# Altium PCB NG_0036526167_Diplomski-rad_PCB.PcbDoc (part 2 of 2)
Units mm, origin at the board's own origin, x right, y up, seen from the top; angles counter-clockwise.
Board outline 100 x 90 mm, 4 copper layers (Top Layer, GND1, GND2, Bottom Layer), stack 1.586 mm thick; 152 components, 97 nets, 539 pads, 128 vias.
Unrouted connection lines stored in the file: 99.
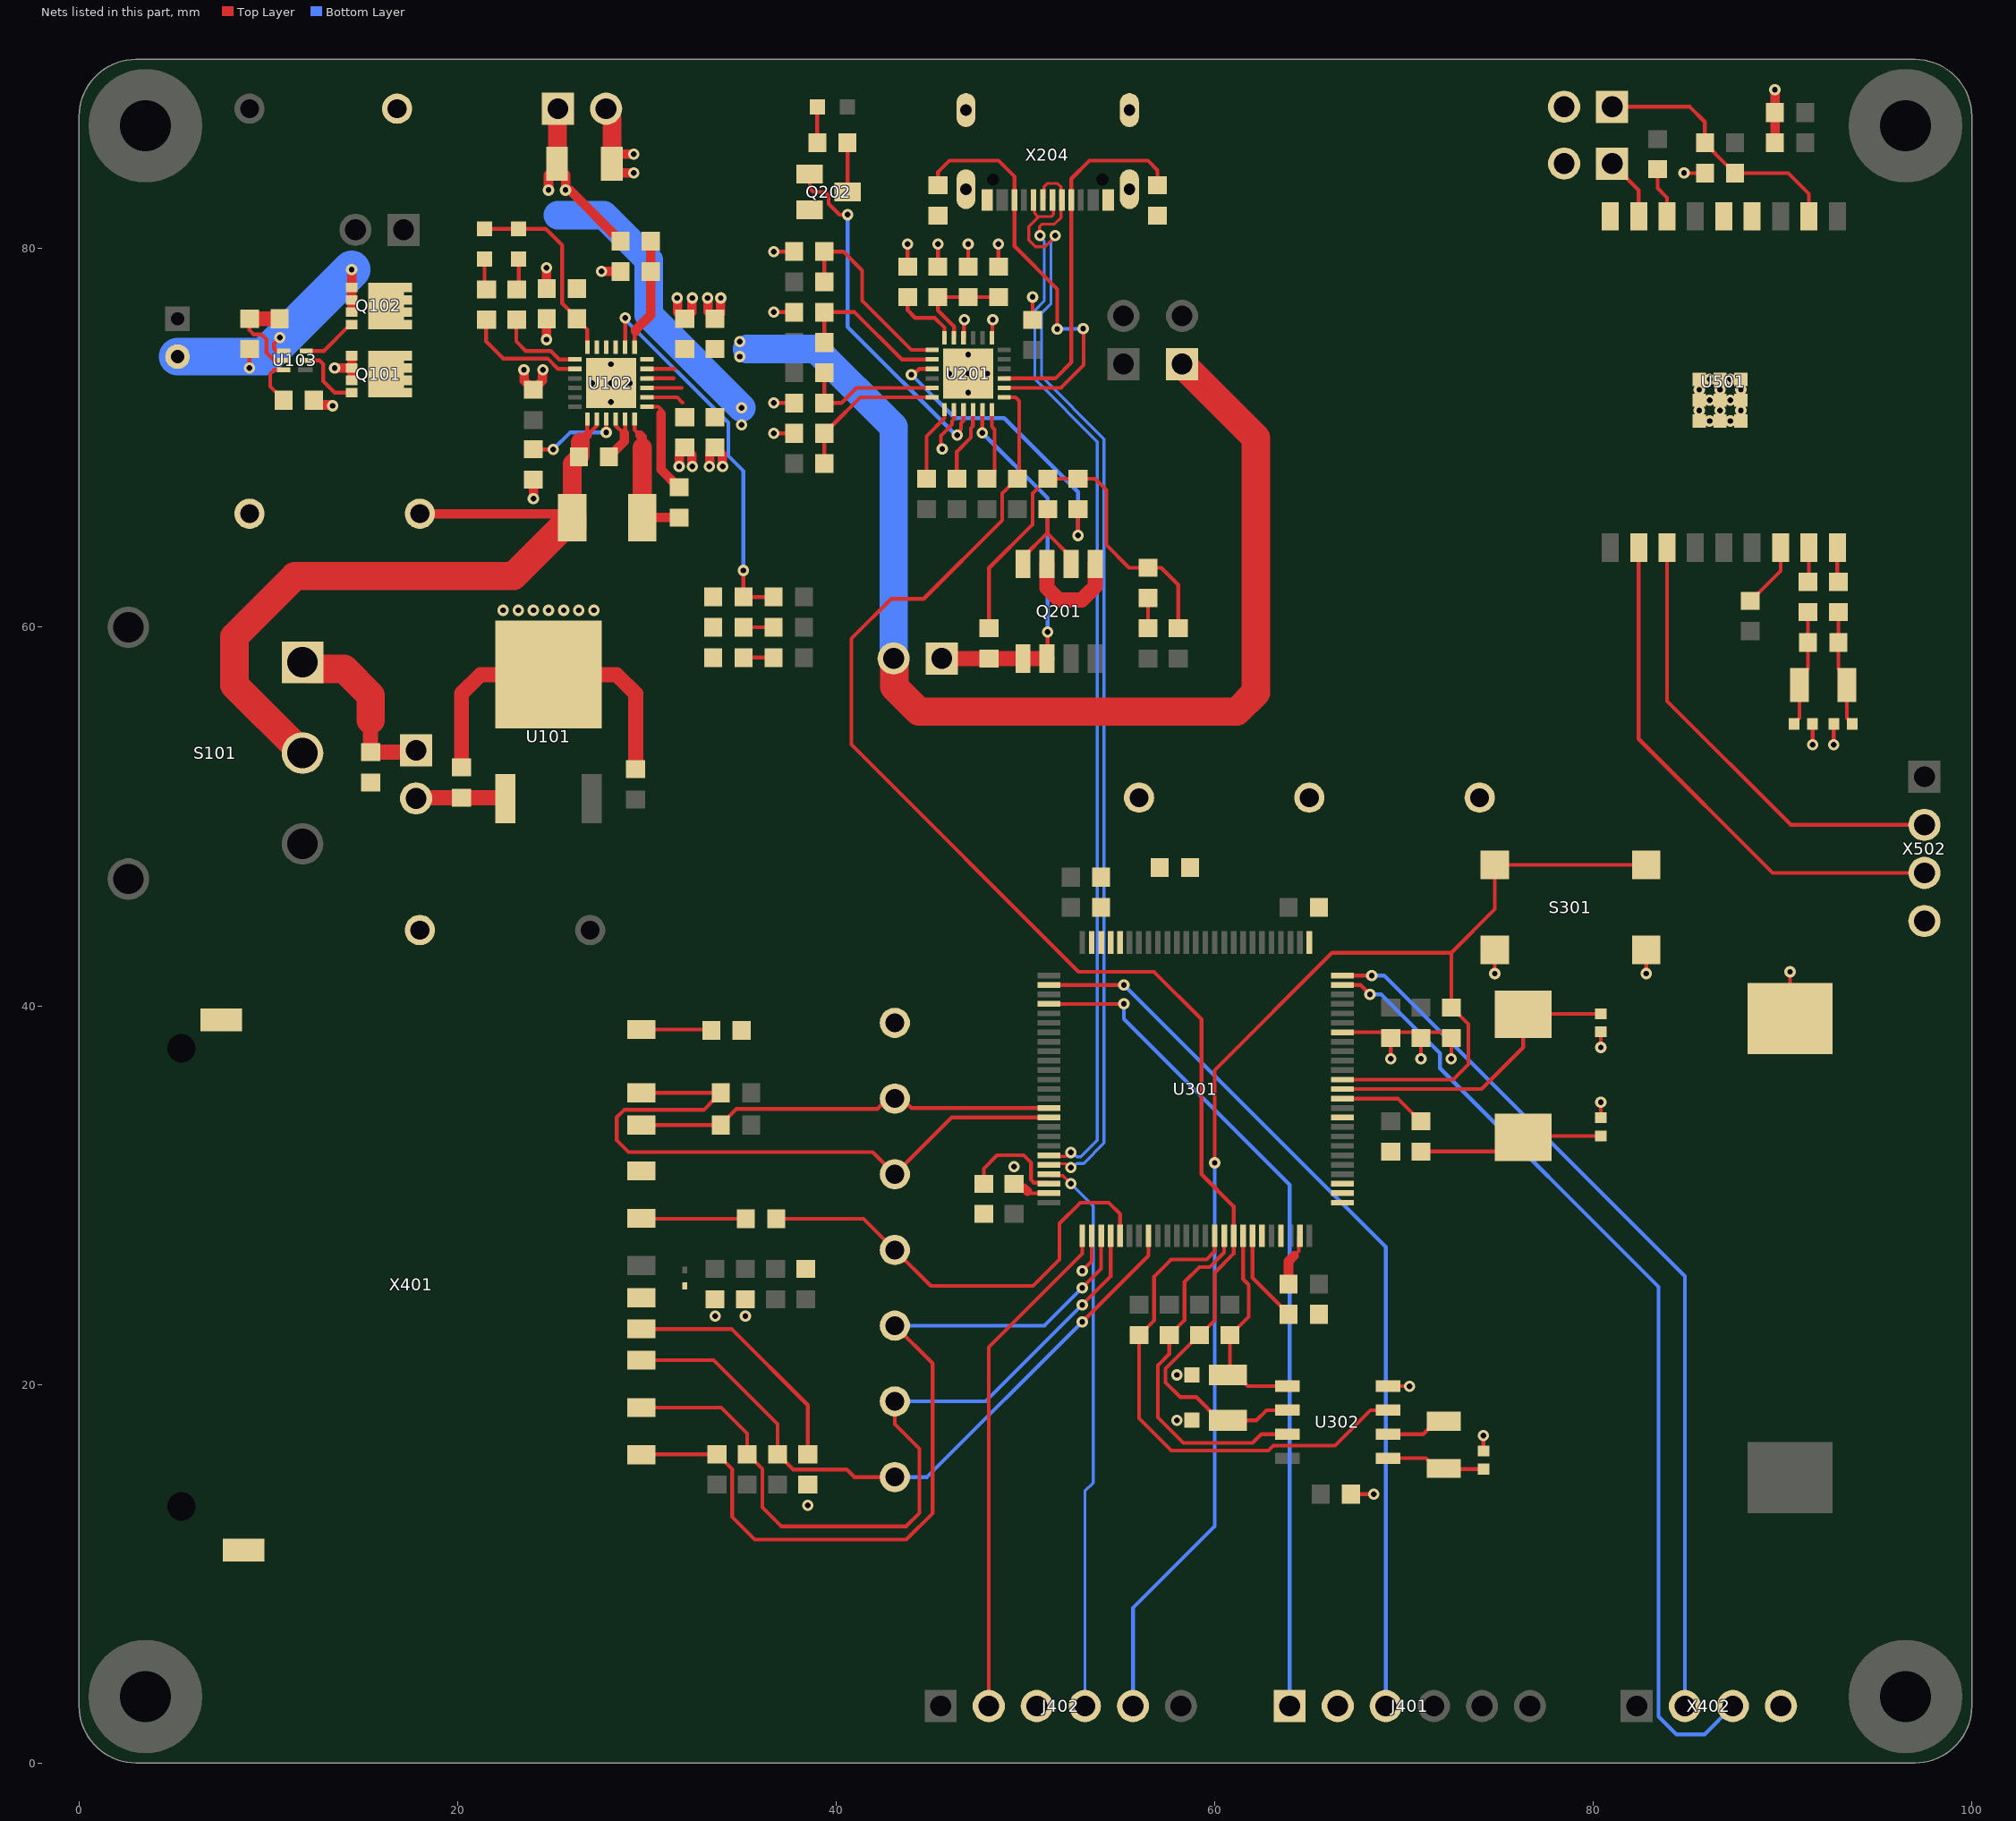
[diagram p4: the nets of this part, all layers, seen from the top]

## Via types
v1: diameter 0.6, hole 0.3, Top Layer to Bottom Layer, tented both sides, 106 vias
v2: diameter 0.6, hole 0.3, Top Layer to Bottom Layer, 22 vias

## Nets (pads, with @x,y where several pads share a name; then routed paths per layer and width w, separated by ;. In a path a pad name is that pad's centre, name@x,y a point inside that pad or via, vN(x,y) a via of type N, cw(c..) or ccw(c..) an arc to the next point about the centre after c; other vN are vias at no path point) (continued)
+VIN: C105.2 C113.1 R101.2 U102.21 X104.1 | length 26
  Top Layer w0.2: U102.21@30,72.65 31.85,72.65
  Top Layer w0.5: v1(24.8,83.1) C113.1@24.8,83.9 ; C113.1@25.7,83.9 v1(25.7,83.1) 25.719,83.081 25.944,83.081 28.6,80.425 R101.2@28.6,80.4
  Top Layer w1: C113.1@25.25,84.5 25.275,84.525 25.275,87.375 X104.1@25.3,87.4
  Bottom Layer w1.5: 25.3,81.775 27.725,81.775 30.1,79.4 30.1,76.5 v1(35,71.6)
  other v1: 35,70.7
+VSYS: C101.2 U101.1 X101.2 | length 4.8
  Top Layer w0.8: X101.2@17.8,50.96 17.84,51 C101.2@20.2,51 22.464,51 U101.1@22.514,50.95
+VSYS_J: C104.2 S101.1 X101.1 | length 9.8
  Top Layer w0.8: 15.4,55.1 C104.2@15.4,53.4 17.7,53.4 X101.1@17.8,53.5
  Top Layer w1.5: S101.1@11.8,58.15 12.15,57.8 14,57.8 15.4,56.4 15.4,55.1
+VUSB: C108.2 U102.22 X201.2 X202.1 | length 63.6
  Top Layer w0.2: U102.22@30,73.15 31.425,73.15
  Top Layer w1.5: X201.2@43.036,58.351 43.075,58.313 43.075,56.85 44.375,55.55 61.175,55.55 62.175,56.55 62.175,70.01 X202.1@58.275,73.91
  Bottom Layer w1.5: 35.3,74.7 38.925,74.7 43.036,70.589 X201.2@43.036,58.351
  other v1: 34.9,74.3 34.9,75.1
+VUSB_J: C202.2 Q201.5 Q201.6 U201.11 X201.1 | length 20.2
  Top Layer w0.2: v1(47.722,70.273) 47.723,70.274 47.723,71.498 U201.11@47.725,71.5 ; Q201.6@51.14,58.352 51.175,58.387 v1(51.175,59.75)
  Top Layer w0.8: X201.1@45.575,58.35 X201.1@45.576,58.351 Q201.6@51.14,58.352
  Bottom Layer w0.2: v1(47.722,70.273) 51.175,66.82 v1(51.175,59.75)
BP_BAT: C112.2 R104.1 U103.5 | length 5.1
  Top Layer w0.2: C112.2@9,76.3 9,75.7 9.225,75.475 9.625,75.475 9.9,75.2 9.9,74.5 10.3,74.1 U103.5@10.8,74.1
  Top Layer w0.8: C112.2@9,76.3 R104.1@10.6,76.3
BP_COUT: Q101.3 U103.2 | length 3.6
  Top Layer w0.2: U103.2@12,74.1 12.7,74.1 12.9,73.9 12.9,73 13.5,72.4 Q101.3@14.4,72.4
BP_DOUT: Q102.3 U103.3 | length 3
  Top Layer w0.2: U103.3@12,74.6 12.935,74.6 14.335,76 Q102.3@14.4,76
BP_V-: R105.2 U103.6 | length 2.5
  Top Layer w0.2: R105.2@10.8,72 10.8,72.025 10.1,72.725 10.1,73.4 10.3,73.6 U103.6@10.8,73.6
BP_VSS: C112.1 Q102.1 U103.4 X103.2 | length 15.4
  Top Layer w0.2: v1(9,73.7) C112.1@9,74.7 ; v1(10.6,75.3) 10.3,75 10.3,74.717 10.417,74.6 U103.4@10.8,74.6
  Top Layer w0.5: 14.4,76.9 Q102.1@14.4,77.3 Q102.1@14.4,77.95 v1(14.4,78.9)
  Bottom Layer w2: X103.2@5.2,74.3 9.8,74.3 v1(14.4,78.9)
CARD_DETECT: R408.2 U301.77 X401.10 | length 15.1
  Top Layer w0.2: X401.10@29.7,22.925 34.475,22.925 38.5,18.9 R408.2@38.5,16.3 ; v1(53,26) 53.5,26.5 U301.77@53.5,27.85
CHG_BOOT: C103.1 U102.19 | length 5.3
  Top Layer w0.2: U102.19@30,71.65 30.6,71.65 30.75,71.5 30.75,71.275
  Top Layer w0.5: 30.75,71.275 30.75,68.325 31.675,67.4 C103.1@31.7,67.4
CHG_C\H\G\: R106.1 U102.8 | length 6.5
  Top Layer w0.2: R106.1@21.525,76.25 21.5,76.225 21.5,75.1 22.4,74.2 24.749,74.2 25.299,73.65 U102.8@26.2,73.65
CHG_DRV: C110.2 D101.2 D102.2 U102.6 | length 10.4
  Top Layer w0.2: D101.2@21.425,81.05 D102.2@23.225,81.05 24.65,81.05 25.525,80.175 25.525,77.1 26.3,76.325 C110.2@26.3,76.3 26.3,76.275 26.85,75.725 U102.6@26.85,74.8
CHG_ILIM: R103.1 U102.15 | length 4.9
  Top Layer w0.2: R103.1@24,69.4 v1(25.05,69.4) ; v1(27.85,70.3) U102.15@27.85,71
  Bottom Layer w0.2: v1(25.05,69.4) 25.95,70.3 v1(27.85,70.3)
CHG_ISET: R108.2 U102.5
CHG_P\G\: R107.1 U102.7 | length 4.7
  Top Layer w0.2: R107.1@23.125,76.25 23.1,76.225 23.1,75.1 23.6,74.6 24.914,74.6 25.364,74.15 U102.7@26.2,74.15
CHG_PMIDI: C106.2 U102.20 | length 2.2
  Top Layer w0.2: U102.20@30,72.15 31.6,72.15 31.875,71.875
  Top Layer w0.5: C106.2@31.875,71.225 C106.2@32,71.1
CHG_PMIDU: C109.2 U102.23 | length 1.5
  Top Layer w0.2: U102.23@30,73.65 31.45,73.65
CHG_SW: C103.2 L101.1 U102.18 | length 7.3
  Top Layer w0.2: U102.18@29.35,71 29.35,70.425 29.625,70.15
  Top Layer w0.5: 29.625,70.15 29.75,70.025 29.75,69.5 ; L101.1@29.75,65.8 C103.2@31.7,65.8
  Top Layer w1: L101.1@29.75,65.8 29.75,69.5
CHG_USB1: R109.2 R112.1 U102.4 U301.3 | length 1.6
  Top Layer w0.2: R112.1@35.1,58.4 R109.2@36.7,58.4
CHG_USB2: R110.2 R113.1 U102.3 U301.2 | length 1.6
  Top Layer w0.2: R113.1@35.1,60 R110.2@36.7,60
CHG_USB3: R111.2 R114.1 U102.2 U301.1 | length 20.5
  Top Layer w0.2: U102.2@28.85,74.8 v1(28.85,76.35) ; v1(35.1,63) R114.1@35.1,61.6 R111.2@36.7,61.6
  Bottom Layer w0.2: v1(28.85,76.35) 28.85,76.265 34.3,70.815 34.3,69.049 35.1,68.249 v1(35.1,63)
CHG_VDPM: R101.1 R102.1 U102.1 | length 6
  Top Layer w0.2: U102.1@29.35,74.8 29.35,75.6 29.4,75.65
  Top Layer w0.5: 29.4,75.65 29.4,75.7 30.2,76.5 R102.1@30.2,78.8 R101.1@30.2,80.4
D101_R: D101.1 R106.2 | length 1.6
  Top Layer w0.2: D101.1@21.425,79.45 21.425,77.95 R106.2@21.525,77.85
D102_R: D102.1 R107.2 | length 1.6
  Top Layer w0.2: R107.2@23.125,77.85 23.225,77.95 D102.1@23.225,79.45
DBG_USART_RX: U301.25 X402.2 | length 47.9
  Top Layer w0.2: U301.25@66.75,41.6 v1(68.3,41.6)
  Bottom Layer w0.2: v1(68.3,41.6) 68.949,41.6 84.84,25.709 X402.2@84.84,2.5
DBG_USART_TX: U301.24 X402.3 | length 51.4
  Top Layer w0.2: U301.24@66.75,41.1 67.7,41.1 v1(68.2,40.6)
  Bottom Layer w0.2: v1(68.2,40.6) 68.8,40.6 71.9,37.5 71.9,36.7 83.45,25.15 83.45,2.45 84.4,1.5 85.88,1.5 X402.3@87.38,3
ESP_EN: C505.2 R503.1 U501.2 X501.1 | length 14.2
  Top Layer w0.2: X501.1@81,87.5 85.1,87.5 85.9,86.7 R503.1@85.9,85.6 85.9,85.575 87.075,84.4 87.125,84.4 87.5,84.025 C505.2@87.5,84 90.3,84 91.4,82.9 U501.2@91.4,81.71
ESP_IO2: R502.1 U501.16 | length 3.5
  Top Layer w0.2: R502.1@88.3,61.4 88.325,61.4 89.9,62.975 U501.16@89.9,64.21
ESP_IO8: R506.1 U501.7 | length 2.7
  Top Layer w0.2: R506.1@83.4,84.2 83.4,83.2 83.9,82.7 U501.7@83.9,81.71
ESP_IO9: U501.8 X503.1 | length 3.4
  Top Layer w0.2: X503.1@81,84.5 82.4,83.1 U501.8@82.4,81.71
ESP_RXD0: U501.11 X502.3 | length 28.1
  Top Layer w0.2: U501.11@82.4,64.21 82.4,54.1 89.48,47.02 X502.3@97.5,47.02
ESP_TXD0: U501.12 X502.2 | length 24.4
  Top Layer w0.2: U501.12@83.9,64.21 83.9,56.1 90.44,49.56 X502.2@97.5,49.56
ESP_XTAL_32K_N: R505.2 U501.17 | length 1.8
  Top Layer w0.2: R505.2@91.35,62.4 91.4,62.45 U501.17@91.4,64.21
ESP_XTAL_32K_P: R501.2 U501.18 | length 1.8
  Top Layer w0.2: U501.18@92.9,64.21 92.9,62.45 R501.2@92.95,62.4
ESP_XTAL_32K_P_N: C504.2 R504.2 R505.1 Y501.1 | length 6.2
  Top Layer w0.2: C504.2@90.62,54.9 90.62,54.925 90.9,55.205 Y501.1@90.9,56.95 90.9,57.35 91.35,57.8 R504.2@91.35,59.2 R505.1@91.35,60.8
ESP_XTAL_32K_P_R: C503.2 R501.1 R504.1 Y501.2 | length 6.2
  Top Layer w0.2: R501.1@92.95,60.8 R504.1@92.95,59.2 92.95,57.8 93.4,57.35 Y501.2@93.4,56.95 93.4,55.205 93.68,54.925 C503.2@93.68,54.9
GND: C101.1 C102.1 C104.1 C105.1 C106.1 C107.1 C108.1 C109.1 C110.1 C111.1 C113.2 C203.1 C204.1 C205.1 C206.1 C207.1 C301.1 C302.1 C303.1 C304.1 C305.1 C306.1 C307.1 C308.1 C309.1 C310.1 C311.1 C312.1 C313.1 C314.1 C315.1 C401.1 C402.1 C403.1 C501.2 C502.2 C503.1 C504.1 C505.1 D301.2 D302.2 D401.1 J401.2 J402.3 Q101.1 Q202.2 R102.2 R103.2 R105.1 R108.1 R112.2 R113.2 R114.2 R203.1 R204.1 R216.1 R217.1 R218.1 R219.1 R306.1 R407.1 R408.1 S301.3 S301.4 TP102.1 TP105.1 TP106.1 TP308.1 TP503.1 U101.2 U102.16 U102.17 U102.24 U102.25 U201.19 U201.22 U201.25 U301.10 U301.19 U301.26 U301.49 U301.74 U301.99 U302.4 U501.9 U501.19 X104.2 X204.1 X204.A1-B12 X204.B1-A12 X301.2 X401.3 X401.6 X401.12 X401.13 X402.4 X502.4 X503.2 | length 87.1
  Top Layer w0.2: U102.16@28.35,71 28.35,70.65 28.7,70.3 28.85,70.3 U102.17@28.85,71 ; v1(36.7,70.25) R217.1@37.775,70.25 ; v1(36.7,71.85) R216.1@37.775,71.85 ; v1(36.7,76.65) R219.1@37.775,76.65 ; v1(36.7,79.85) R218.1@37.775,79.85 ; C203.1@43.775,79.05 v1(43.775,80.25) ; C206.1@45.375,79.05 v1(45.375,80.25) ; U201.22@46.725,75.3 46.745,75.32 46.745,76.22 v1(46.775,76.25) ; C205.1@46.975,79.05 v1(46.975,80.25) ; U201.19@48.225,75.3 48.245,75.32 48.245,76.22 v1(48.275,76.25) ; C204.1@48.575,79.05 v1(48.575,80.25) ; 50.1,30.2 50.2,30.1 U301.74@51.25,30.1 ; C207.1@50.375,76.25 v1(50.375,77.45) ; 64.2,26.8 64.45,27.05 64.45,27.8 U301.99@64.5,27.85 ; U301.19@66.75,38.6 72.2,38.6 C315.1@72.5,38.3 v1(72.5,37.2) ; C312.1@67.2,14.2 v1(68.4,14.2) ; U302.4@69.15,19.905 69.155,19.9 v1(70.3,19.9) ; v1(69.3,37.2) C309.1@69.3,38.3 ; v1(70.9,37.2) C310.1@70.9,38.3 ; C313.1@74.2,16.48 v1(74.2,17.3) ; v1(74.8,41.7) S301.3@74.8,42.95 ; C311.1@80.4,34.08 v1(80.4,34.9) ; v1(80.4,37.8) C314.1@80.4,38.62 ; v1(82.8,41.7) S301.4@82.8,42.95 ; v1(84.8,84) C505.1@85.9,84 ; X301.2@90.4,39.325 v1(90.4,41.8) ; C504.1@91.58,54.9 91.59,54.89 91.59,53.81 v1(91.6,53.8) ; v1(92.7,53.8) 92.71,53.81 92.71,54.89 C503.1@92.72,54.9
  Top Layer w0.5: R105.1@12.4,72 12.4,71.975 12.625,71.75 13.323,71.75 13.373,71.7 v1(13.4,71.7) ; v1(13.5,73.7) Q101.1@14.4,73.7 ; 14.4,73.3 Q101.1@14.4,73.7 ; Q101.1@14.4,74.35 Q101.1@14.4,73.7 ; v1(23.5,73.6) 23.519,73.581 23.519,73.031 C111.1@23.75,72.8 ; v1(24,66.8) R103.2@24,67.8 ; C111.1@24,72.55 24.025,72.55 24.25,72.775 24.25,72.8 24.481,73.031 24.481,73.581 v1(24.5,73.6) ; v1(24.7,75.2) C110.1@24.7,76.3 ; R108.1@24.7,77.9 v1(24.7,79) ; v1(27.6,78.8) R102.2@28.6,78.8 ; C107.1@28,69 28,69.025 28.8,69.825 28.8,70.25 ; v1(29.3,84) 28.475,84 28.15,84.325 C113.2@28.15,84.5 28.15,84.675 28.475,85 v1(29.3,85) ; v1(31.6,77.4) 31.619,77.381 31.619,76.656 31.975,76.3 C109.1@32,76.3 32.025,76.3 32.381,76.656 32.381,77.381 v1(32.4,77.4) ; v1(31.7,68.5) 31.719,68.519 31.719,69.219 C106.1@31.75,69.25 ; C106.1@32,69.5 32.025,69.5 32.25,69.275 32.25,69.25 32.381,69.119 32.381,68.519 v1(32.4,68.5) ; v1(33.2,77.4) 33.219,77.381 33.219,76.681 C108.1@33.35,76.55 ; v1(33.3,68.5) 33.319,68.519 33.319,69.219 C105.1@33.35,69.25 ; C105.1@33.6,69.5 33.625,69.5 33.85,69.275 33.85,69.25 33.981,69.119 33.981,68.519 v1(34,68.5) ; C108.1@33.6,76.3 33.625,76.3 33.85,76.525 33.85,76.55 33.881,76.581 33.881,77.381 v1(33.9,77.4) ; C304.1@49.4,30.6 49.625,30.375 49.925,30.375 50.1,30.2 ; C308.1@63.9,25.3 63.9,26.5 64.2,26.8 ; C502.2@89.6,85.6 C501.2@89.6,87.2 v1(89.6,88.4)
  Top Layer w0.8: C101.1@20.2,52.6 20.2,56.5 21.2,57.5 U101.2@24.8,57.5 28.4,57.5 29.4,56.5 C102.1@29.4,52.6
  Top Layer w1: X104.2@27.84,87.4 27.84,87.211 28.15,86.901 C113.2@28.15,84.675
  other v1: 38.5,13.6 58,18.1 58,20.5 33.6,23.6 35.2,23.6 49.4,31.5 22.4,60.9 23.2,60.9 24,60.9 24.8,60.9 25.6,60.9 26.4,60.9 27.2,60.9
  other v2: 86.15,70.9 87.25,70.9 85.6,71.45 86.7,71.45 87.8,71.45 28.1,71.9 86.15,72 87.25,72 46.975,72.4 85.6,72.55 86.7,72.55 87.8,72.55 27.1,72.9 28.1,72.9 29.1,72.9 86.15,73.1 87.25,73.1 45.975,73.4 46.975,73.4 47.975,73.4 28.1,73.9 46.975,74.4
HSE_IN: R305.2 U301.12 | length 4.6
  Top Layer w0.2: U301.12@66.75,35.1 69.675,35.1 70.875,33.9 R305.2@70.9,33.9
HSE_IN_R: C311.2 R305.1 Y302.2 | length 9.8
  Top Layer w0.2: R305.1@70.9,32.3 75.55,32.3 Y302.2@76.3,33.05 76.37,33.12 C311.2@80.4,33.12
HSE_OUT: C314.2 U301.13 Y302.1 | length 16.3
  Top Layer w0.2: U301.13@66.75,35.6 74.1,35.6 76.3,37.8 Y302.1@76.3,39.55 76.33,39.58 C314.2@80.4,39.58
I2C1_SCL: D302.1 R208.1 R304.1 U201.13 U301.92 U302.6 | length 77.2
  Top Layer w0.2: U201.13@48.875,72.15 49.475,72.15 49.675,71.95 49.675,67.95 R208.1@49.575,67.85 49.55,67.85 48.775,67.075 48.775,65.65 44.625,61.5 42.9,61.5 40.8,59.4 40.8,53.8 52.8,41.8 56.793,41.8 59.3,39.293 59.3,31.1 61,29.4 U301.92@61,27.85 61,26.9 60,25.9 60,24.799 60,23.375 59.225,22.6 R304.1@59.2,22.6 59.175,22.6 57.4,20.825 57.4,20.1 58.175,19.325 59.025,19.325 60.25,18.1 D302.1@60.7,18.1 62.2,18.1 62.735,18.635 U302.6@63.85,18.635
I2C1_SDA: D301.1 R207.1 R303.1 U201.12 U301.93 U302.5 | length 15.2
  Top Layer w0.2: R207.1@47.975,67.85 48,67.85 48.375,68.225 48.375,68.25 48.375,70.45 48.225,70.6 U201.12@48.225,71.5 ; U301.93@61.5,27.85 61.5,25.559 61.8,25.259 61.8,23.575 60.825,22.6 R303.1@60.8,22.6 60.8,20.6 D301.1@60.7,20.5 61.15,20.5 61.745,19.905 U302.5@63.85,19.905
I2S2_CK: J401.3 U301.52 | length 48.3
  Top Layer w0.2: U301.52@51.25,41.1 v1(55.2,41.1)
  Bottom Layer w0.2: v1(55.2,41.1) 69.04,27.26 J401.3@69.04,2.5
I2S2_SD: J401.1 U301.54 | length 45.2
  Top Layer w0.2: U301.54@51.25,40.1 v1(55.2,40.1)
  Bottom Layer w0.2: v1(55.2,40.1) 55.2,39.3 63.96,30.54 J401.1@63.96,2.5
MCU_BOOT1: R306.2 U301.94 | length 4.9
  Top Layer w0.2: U301.94@62,27.85 62,25.625 63.9,23.725 R306.2@63.9,23.7
MCU_NRST: C315.2 J402.5 S301.1 S301.2 U301.14 X501.2 | length 77.3
  Top Layer w0.2: v1(60,31.7) 60,36.6 66.2,42.8 72.5,42.8 ; U301.14@66.75,36.1 72.6,36.1 73.4,36.9 73.4,39.025 72.525,39.9 C315.2@72.5,39.9 72.5,42.8 ; S301.2@82.8,47.45 S301.1@74.8,47.45 74.8,45.1 72.5,42.8
  Bottom Layer w0.2: J402.5@55.68,3 55.68,8.18 60,12.5 v1(60,31.7)
MCU_VCAP1: C302.2 U301.48
MCU_VCAP2: C301.2 U301.73 | length 5.7
  Top Layer w0.2: C301.2@47.8,30.6 47.8,31.4 48.5,32.1 49.9,32.1 50.3,31.7 50.3,30.8 50.45,30.65 51.2,30.65 U301.73@51.25,30.6
NetC107_2: C107.2 L101.2 S101.2 TP103.1 U102.13 U102.14 | length 43.1
  Top Layer w0.2: U102.13@26.85,71 26.85,70.15 27.35,70.65 U102.14@27.35,71
  Top Layer w0.5: TP103.1@18,66 25.55,66 25.85,66 L101.2@26.05,65.8 ; 26.475,69.775 26.85,70.15
  Top Layer w1: L101.2@26.05,65.8 26.05,66 26.05,68.65 C107.2@26.4,69 26.475,69.075 26.475,69.775
  Top Layer w1.5: S101.2@11.8,53.35 8.2,56.95 8.2,59.5 11.4,62.7 22.95,62.7 25.55,65.3 26.05,65.3 L101.2@26.05,65.8
NetQ101_2: Q101.2 Q102.2
RTC_CLKOUT: R302.1 U301.91 U302.7 | length 19
  Top Layer w0.2: U301.91@60.5,27.85 60.5,26.966 59.734,26.2 59.2,26.2 58.4,25.4 58.4,23.375 57.625,22.6 R302.1@57.6,22.6 57.6,21.6 57,21 57,18.251 58.351,16.9 62,16.9 62.465,17.365 U302.7@63.85,17.365
RTC_I\N\T\: R301.1 U301.90 U302.3 | length 27.2
  Top Layer w0.2: U301.90@60,27.85 60,27.031 59.569,26.6 57.7,26.6 56.8,25.7 56.8,24.799 56.8,23.375 56.025,22.6 R301.1@56,22.6 56,18.2 57.7,16.5 62.835,16.5 63.1,16.765 66.365,16.765 68.235,18.635 U302.3@69.15,18.635
RTC_OSCI: C313.2 U302.1 Y301.1 | length 5.3
  Top Layer w0.2: U302.1@69.15,16.095 71.155,16.095 71.7,15.55 Y301.1@72.1,15.55 72.13,15.52 C313.2@74.2,15.52
RTC_OSCO: U302.2 Y301.2 | length 3.2
  Top Layer w0.2: U302.2@69.15,17.365 71.015,17.365 71.7,18.05 Y301.2@72.1,18.05
SDMMC1_CK: R406.1 TP310.1 U301.80 | length 24
  Top Layer w0.2: R406.1@36.825,28.75 41.45,28.75 TP310.1@43.1,27.1 45,25.2 50.4,25.2 51.8,26.6 51.8,28.5 52.9,29.6 54.4,29.6 55,29 U301.80@55,27.85
SDMMC1_CK_R: R406.2 X401.5 | length 5.5
  Top Layer w0.2: X401.5@29.7,28.775 29.725,28.75 R406.2@35.225,28.75
SDMMC1_CMD: R401.1 TP306.1 U301.83 X401.2 | length 36.2
  Top Layer w0.2: X401.2@29.7,21.275 33.525,21.275 36.9,17.9 R401.1@36.9,16.3 36.925,16.3 37.725,15.5 40.561,15.5 40.961,15.1 TP306.1@43.1,15.1 ; v1(53,23.3) 56.5,26.8 U301.83@56.5,27.85
  Bottom Layer w0.2: TP306.1@43.1,15.1 44.8,15.1 v1(53,23.3)
SDMMC1_D0: R402.1 TP302.1 U301.65 X401.7 | length 22.4
  Top Layer w0.2: X401.7@29.7,33.7 R402.1@33.9,33.7 33.9,33.725 34.724,34.549 42.17,34.549 42.721,35.1 TP302.1@43.1,35.1 43.479,35.1 43.979,34.6 U301.65@51.25,34.6
SDMMC1_D1: R403.1 TP305.1 U301.66 X401.8 | length 36.3
  Top Layer w0.2: X401.8@29.7,35.4 R403.1@33.9,35.4 33.9,35.375 33.525,35 33.5,35 33,34.5 28.8,34.5 28.4,34.1 28.4,32.9 29.027,32.273 41.927,32.273 TP305.1@43.1,31.1 46.1,34.1 U301.66@51.25,34.1
SDMMC1_D2: R404.1 TP309.1 U301.78 X401.9 | length 44
  Top Layer w0.2: X401.9@29.7,16.275 29.725,16.3 R404.1@33.7,16.3 33.725,16.3 34.5,15.525 34.5,13 35.7,11.8 43.7,11.8 45.1,13.2 45.1,21.1 TP309.1@43.1,23.1 ; v1(53,25.1) 54,26.1 U301.78@54,27.85
  Bottom Layer w0.2: TP309.1@43.1,23.1 51,23.1 v1(53,25.1)
SDMMC1_D3: R405.1 TP303.1 U301.79 X401.1 | length 42.1
  Top Layer w0.2: X401.1@29.7,18.775 33.925,18.775 35.3,17.4 R405.1@35.3,16.3 35.325,16.3 36.1,15.525 36.1,15.299 36.1,13.5 37.1,12.5 43.7,12.5 44.4,13.2 44.4,16.6 43.1,17.9 TP303.1@43.1,19.1 ; v1(53,24.2) 54.5,25.7 U301.79@54.5,27.85
  Bottom Layer w0.2: TP303.1@43.1,19.1 47.9,19.1 v1(53,24.2)
SWCLK: J402.2 U301.76 | length 26.8
  Top Layer w0.2: J402.2@48.06,3.1 48.06,21.96 53,26.9 U301.76@53,27.85
SWDIO: J402.4 U301.72 | length 30.1
  Top Layer w0.155: U301.72@51.25,31.1 51.323,31.027 51.973,31.027 v1(52.4,30.6)
  Bottom Layer w0.155: v1(52.4,30.6) 53.577,29.423 53.577,14.797 53.14,14.36 J402.4@53.14,2.5
USART3_RX: TP502.1 U301.47 U501.5
USART3_TX: TP501.1 U301.46 U501.4
USB_CC1: R203.2 U201.15 X204.A5 | length 19.6
  Top Layer w0.2: U201.15@48.875,73.15 51.575,73.15 52.425,74 X204.A5@52.425,82.572 52.425,83.7 53.375,84.65 56.475,84.65 56.975,84.15 R203.2@56.975,83.35
USB_CC2: R204.2 U201.14 X204.B5 | length 22.3
  Top Layer w0.2: R204.2@45.375,83.35 45.375,84.05 45.975,84.65 48.575,84.65 49.425,83.8 X204.B5@49.425,82.572 49.425,80.127 51.675,77.877 v1(51.675,75.75) ; U201.14@48.875,72.65 51.875,72.65 53.075,73.85 53.075,75.75 v1(53.051,75.774)
  Bottom Layer w0.2: v1(51.675,75.75) 51.687,75.762 53.039,75.762 v1(53.051,75.774)
USB_OTG_FS_N: U301.70 X204.A7 X204.B7 | length 57.8
  Top Layer w0.155: v1(50.775,80.7) 50.744,80.731 50.744,81.179 50.861,81.297 51.323,81.297 51.326,81.3 51.524,81.3 51.875,81.651 X204.B7@51.875,82.522 ; X204.A7@50.925,82.572 50.975,82.622 50.975,83.271 51.151,83.447 51.699,83.447 51.875,83.271 X204.B7@51.875,82.622 ; U301.70@51.25,32.1 51.3,32.05 52.15,32.05 52.35,32.25 v1(52.4,32.25)
  Top Layer w0.2: X204.B7@51.875,82.522 X204.B7@51.925,82.572 X204.B7@51.875,82.622
  Bottom Layer w0.155: v1(50.775,80.7) 50.775,80.609 50.998,80.387 50.998,77.256 50.5,76.758 50.5,73.1 53.8,69.8 53.8,32.898 52.93,32.027 52.713,32.027 52.491,32.25 v1(52.4,32.25)
USB_OTG_FS_P: U301.71 X204.A6 X204.B6 | length 59.1
  Top Layer w0.155: X204.B6@50.425,82.572 50.475,82.522 50.475,81.872 50.651,81.697 50.696,81.697 ; U301.71@51.25,31.6 51.3,31.65 52.15,31.65 52.35,31.45 v1(52.4,31.45) ; X204.A6@51.425,82.572 51.475,82.522 51.475,81.817 51.358,81.7 51.161,81.7 51.157,81.697 50.696,81.697 ; v1(51.575,80.7) 51.575,80.651 51.024,80.1 50.526,80.1 50.175,80.451 50.175,81.176 50.696,81.697
  Bottom Layer w0.155: v1(51.575,80.7) 51.575,80.609 51.352,80.387 51.352,77.109 50.855,76.611 50.855,73.247 54.155,69.947 54.155,32.751 53.077,31.673 52.713,31.673 52.491,31.45 v1(52.4,31.45)
USB_PD_FAULT: Q202.1 U201.9 | length 19.2
  Top Layer w0.2: Q202.1@38.6,83.95 38.6,83.2 38.8,83 39.4,83 39.6,82.8 39.6,82.376 40.175,81.8 v1(40.6,81.8) ; v1(46.4,70.15) 46.4,70.258 46.6,70.458 46.6,70.789 46.725,70.914 U201.9@46.725,71.5
  Bottom Layer w0.2: v1(40.6,81.8) 40.6,75.876 46.326,70.15 v1(46.4,70.15)
USB_PD_FET_EN: R206.1 U201.3 | length 16.3
  Top Layer w0.2: v1(43.975,73.35) 44.083,73.35 44.383,73.65 U201.3@45.075,73.65 ; v1(52.775,64.85) R206.1@52.775,66.249
  Bottom Layer w0.2: v1(43.975,73.35) 46.275,71.05 48.875,71.05 52.775,67.15 v1(52.775,64.85)
USB_PD_FET_G: Q201.2 Q201.4 R202.2 | length 5.6
  Top Layer w0.2: Q201.4@49.87,63.347 49.87,63.699 51.106,64.934 51.175,64.934 ; R202.2@51.175,66.25 51.175,64.934 ; Q201.2@52.41,63.347 52.41,63.699 51.175,64.934
USB_PD_FET_G_R: C201.1 C202.1 R202.1 R205.1 R206.2 | length 22.4
  Top Layer w0.2: C202.1@48.075,59.95 48.075,63.13 50.375,65.43 50.375,67.075 51.15,67.85 R202.1@51.175,67.85 52.775,67.85 53.675,67.85 54.275,67.25 54.275,64.35 55.475,63.15 R205.1@56.475,63.15 57.175,63.15 58.075,62.25 C201.1@58.075,59.95
USB_PD_FET_RC: R201.1 R205.2 | length 1.6
  Top Layer w0.2: R201.1@56.475,59.95 R205.2@56.475,61.55
USB_PD_FET_SD: Q201.1 Q201.3 | length 5.6
  Top Layer w0.8: Q201.3@51.14,63.347 51.141,63.346 51.141,62.083 51.775,61.45 52.975,61.45 53.275,61.75 53.679,62.154 53.679,63.346 Q201.1@53.68,63.347
USB_PD_FLIP: R210.1 U201.10 | length 4
  Top Layer w0.2: R210.1@46.375,67.85 46.375,69.276 47.122,70.023 47.122,70.521 47.225,70.624 U201.10@47.225,71.5
USB_PD_GPIO_1: U201.8 U301.95 | length 2.4
  Top Layer w0.2: v1(45.6,69.425) 45.526,69.498 45.526,70.125 46.125,70.723 46.125,70.9 46.225,71 U201.8@46.225,71.5
USB_PD_I\N\T\: R209.1 U201.7 U301.97 | length 4
  Top Layer w0.2: R209.1@44.775,67.85 44.775,70.1 45.725,71.05 U201.7@45.725,71.5
USB_PD_ISNK_COARSE: R212.1 R216.2 U201.5 | length 7.6
  Top Layer w0.2: R212.1@39.375,73.45 R216.2@39.375,71.85 40.275,71.85 41.075,72.65 U201.5@45.075,72.65
USB_PD_ISNK_FINE: R213.1 R217.2 U201.6 | length 8.1
  Top Layer w0.2: R213.1@39.375,68.65 R217.2@39.375,70.25 39.375,70.275 39.75,70.65 39.775,70.65 41.275,72.15 U201.6@45.075,72.15
USB_PD_LED_Q: Q202.3 R211.1 | length 2.6
  Top Layer w0.2: Q202.3@40.6,83 R211.1@40.6,85.6
USB_PD_LED_R: D201.1 R211.2 | length 1.9
  Top Layer w0.2: R211.2@39,85.6 D201.1@39,87.5
USB_PD_VBUS_MAX: R215.1 R219.2 U201.2 | length 8.3
  Top Layer w0.2: R215.1@39.375,75.05 R219.2@39.375,76.65 40.975,76.65 43.475,74.15 U201.2@45.075,74.15
USB_PD_VBUS_MIN: R214.1 R218.2 U201.1 | length 10.4
  Top Layer w0.2: R214.1@39.375,78.25 R218.2@39.375,79.85 40.375,79.85 41.375,78.85 41.375,77.25 43.975,74.65 U201.1@45.075,74.65
USB_PD_VCDD: C203.2 U201.24 | length 3.6
  Top Layer w0.2: C203.2@43.775,77.45 43.775,76.75 44.175,76.35 45.209,76.35 45.725,75.834 U201.24@45.725,75.3
USB_PD_VDDD: C204.2 C205.2 C206.2 U201.23 | length 5.7
  Top Layer w0.2: U201.23@46.225,75.3 46.225,75.9 45.375,76.75 C206.2@45.375,77.45 C204.2@48.575,77.45
WRITE_PROTECT: R407.2 X401.11 | length 3.7
  Top Layer w0.2: X401.11@29.7,38.75 33.35,38.75 R407.2@33.4,38.7
pads on no net: J401.4 J402.6 S101.0 S101.3 U102.9 U102.10 U103.1 U201.4 U201.16 U201.17 U201.20 U201.21 U301.4 U301.5 U301.7 U301.8 U301.9 U301.15 U301.16 U301.17 U301.18 U301.22 U301.23 U301.28 U301.29 U301.30 U301.31 U301.32 U301.33 U301.34 U301.35 U301.36 U301.37 U301.38 U301.39 U301.40 U301.41 U301.42 U301.43 U301.44 U301.45 U301.51 U301.53 U301.55 U301.56 U301.57 U301.58 U301.59 U301.60 U301.61 U301.62 U301.63 U301.64 U301.67 U301.68 U301.69 U301.81 U301.82 U301.84 U301.85 U301.86 U301.87 U301.88 U301.89 U301.96 U301.98 U501.3 U501.6 U501.10 U501.13 U501.14 U501.15 X204.0 X204.A8 X204.B8 X401.0

## Polygon pours and split planes (outlines as drawn)
GND on GND1 "NONET_L02_P000" (solid, remove dead copper, shelved, pour order 0): 0,0 100,0 100,90 0,90
GND on GND2 "NONET_L03_P001" (solid, remove dead copper, shelved, pour order 1): 0,0 100,0 100,90 0,90

## Keep-outs
Keep-Out Layer:
  circle w0.2: c3.5,3.5 r4
  circle w0.2: c96.5,3.5 r4
  circle w0.2: c96.5,86.5 r4
  circle w0.2: c3.5,86.5 r4
  lines w0.2: 1,6.7 1,83.3 ; 6.7,1 93.3,1 ; 6.7,89 93.3,89 ; 99,6.7 99,83.3

## Other copper
Top Layer:
  region net GND: 22,60.3 22,61.1 22.2,61.3 27.4,61.3 27.6,61.1 27.6,60.3
  region net +VIN: 34.9,72 34.5,71.6 33.4,71.6 33.4,70.625 34.1,70.625 34.125,70.6 34.6,70.6 34.9,70.3 35.1,70.3 35.4,70.6 35.4,71.7 35.1,72
  region net +VUSB: 33.1,74.225 34.45,74.225 34.725,73.95 35.15,73.95 35.325,74.125 35.325,75.325 35.15,75.5 34.725,75.5 34.4,75.175 33.1,75.175
  region net +VUSB: 30.45,73.05 33.525,73.05 34.1,73.625 34.1,75.175 33.1,75.175 33.1,74.225 32.125,73.25 30.45,73.25
  region net CHG_PMIDU: 30.425,73.55 32,73.55 32.5,74.05 32.5,75.175 31.5,75.175 31.5,74.25 31,73.75 30.425,73.75
  region net CHG_PMIDI: 30.525,72.05 31.025,72.05 31.5,71.575 31.5,70.625 32.5,70.625 32.5,71.65 31.9,72.25 30.525,72.25
  region net +VIN: 30.55,72.55 32.125,72.55 33.1,71.575 33.1,70.625 34.1,70.625 34.1,72.175 33.525,72.75 30.55,72.75
Bottom Layer:
  region net +VIN: 24.55,81.775 26.05,81.775 26.05,82.75 26.1,82.8 26.1,83.2 25.8,83.5 24.6,83.5 24.4,83.3 24.4,82.8 24.55,82.65
  region net +VIN: 34.6,70.6 34.6,71.7 34.9,72 35.1,72 35.4,71.7 35.4,70.6 35.1,70.3 34.9,70.3
  region net +VUSB: 34.7,75.5 35.1,75.5 35.3,75.3 35.3,74.1 35.1,73.9 34.7,73.9 34.5,74.1 34.5,75.3

## Silkscreen, mask and mechanical layers (free items; w line width, h text height)
Top Overlay:
  text "+3.3V" at 7.514,84.242 h1.02
  text "GND" at 15.214,84.242 h1.02
  text "CHG" at 22.158,82.114 h1.02 r90
  text "PG" at 23.937,82.117 h1.02 r90
  text "GND" at 7.514,62.842 h1.02
  text "+VSYS" at 16.514,62.842 h1.02
  text "+3.3V" at 91.8,51.45 h1.02
  text "RX" at 91.8,48.75 h1.02
  text "TX" at 91.8,46.25 h1.02
  text "GND" at 16.514,45.642 h1.02
  text "+3V3" at 25.514,45.642 h1.02
  text "ESP USART" at 91.25,43.82 h1.02 r90
  text "GND" at 91.8,43.65 h1.02
  text "SWD" at 44.9,8.95 h1.02
  text "I2S" at 63.26,8.95 h1.02
  text "MCU USART" at 81.72,8.95 h1.02
  text "+3.3V" at 46.41,4.7 h1.02 r90
  text "SWCLK" at 48.91,4.7 h1.02 r90
  text "GND" at 51.41,4.7 h1.02 r90
  text "SWDIO" at 53.91,4.7 h1.02 r90
  text "NRST" at 56.41,4.7 h1.02 r90
  text "GND" at 58.95,4.7 h1.02 r90
  text "I2S_SD" at 64.71,4.7 h1.02 r90
  text "GND" at 67.21,4.7 h1.02 r90
  text "I2S_CK" at 69.71,4.7 h1.02 r90
  text "N. C." at 72.21,4.7 h1.02 r90
  text "+3.3V" at 74.71,4.7 h1.02 r90
  text "+3.3V" at 77.21,4.7 h1.02 r90
  text "+3.3V" at 83.17,4.7 h1.02 r90
  text "RX" at 85.67,4.7 h1.02 r90
  text "TX" at 88.17,4.7 h1.02 r90
  text "GND" at 90.67,4.7 h1.02 r90
Mechanical 1:
  the board outline again, w0.2

## Text inside footprints (layer, text, board x,y; h text height)
U501: Top Overlay "Antenna" at 95.954,77.706 h1.52 r270